# Altium PCB 6106 RC522门禁卡.PcbDoc
Units mil, origin at the board's own origin, x right, y up, seen from the top; angles counter-clockwise.
Board outline 3555 x 3945 mil, 2 copper layers (Top Layer, Bottom Layer); 30 components, 46 nets, 153 pads, 2 vias.
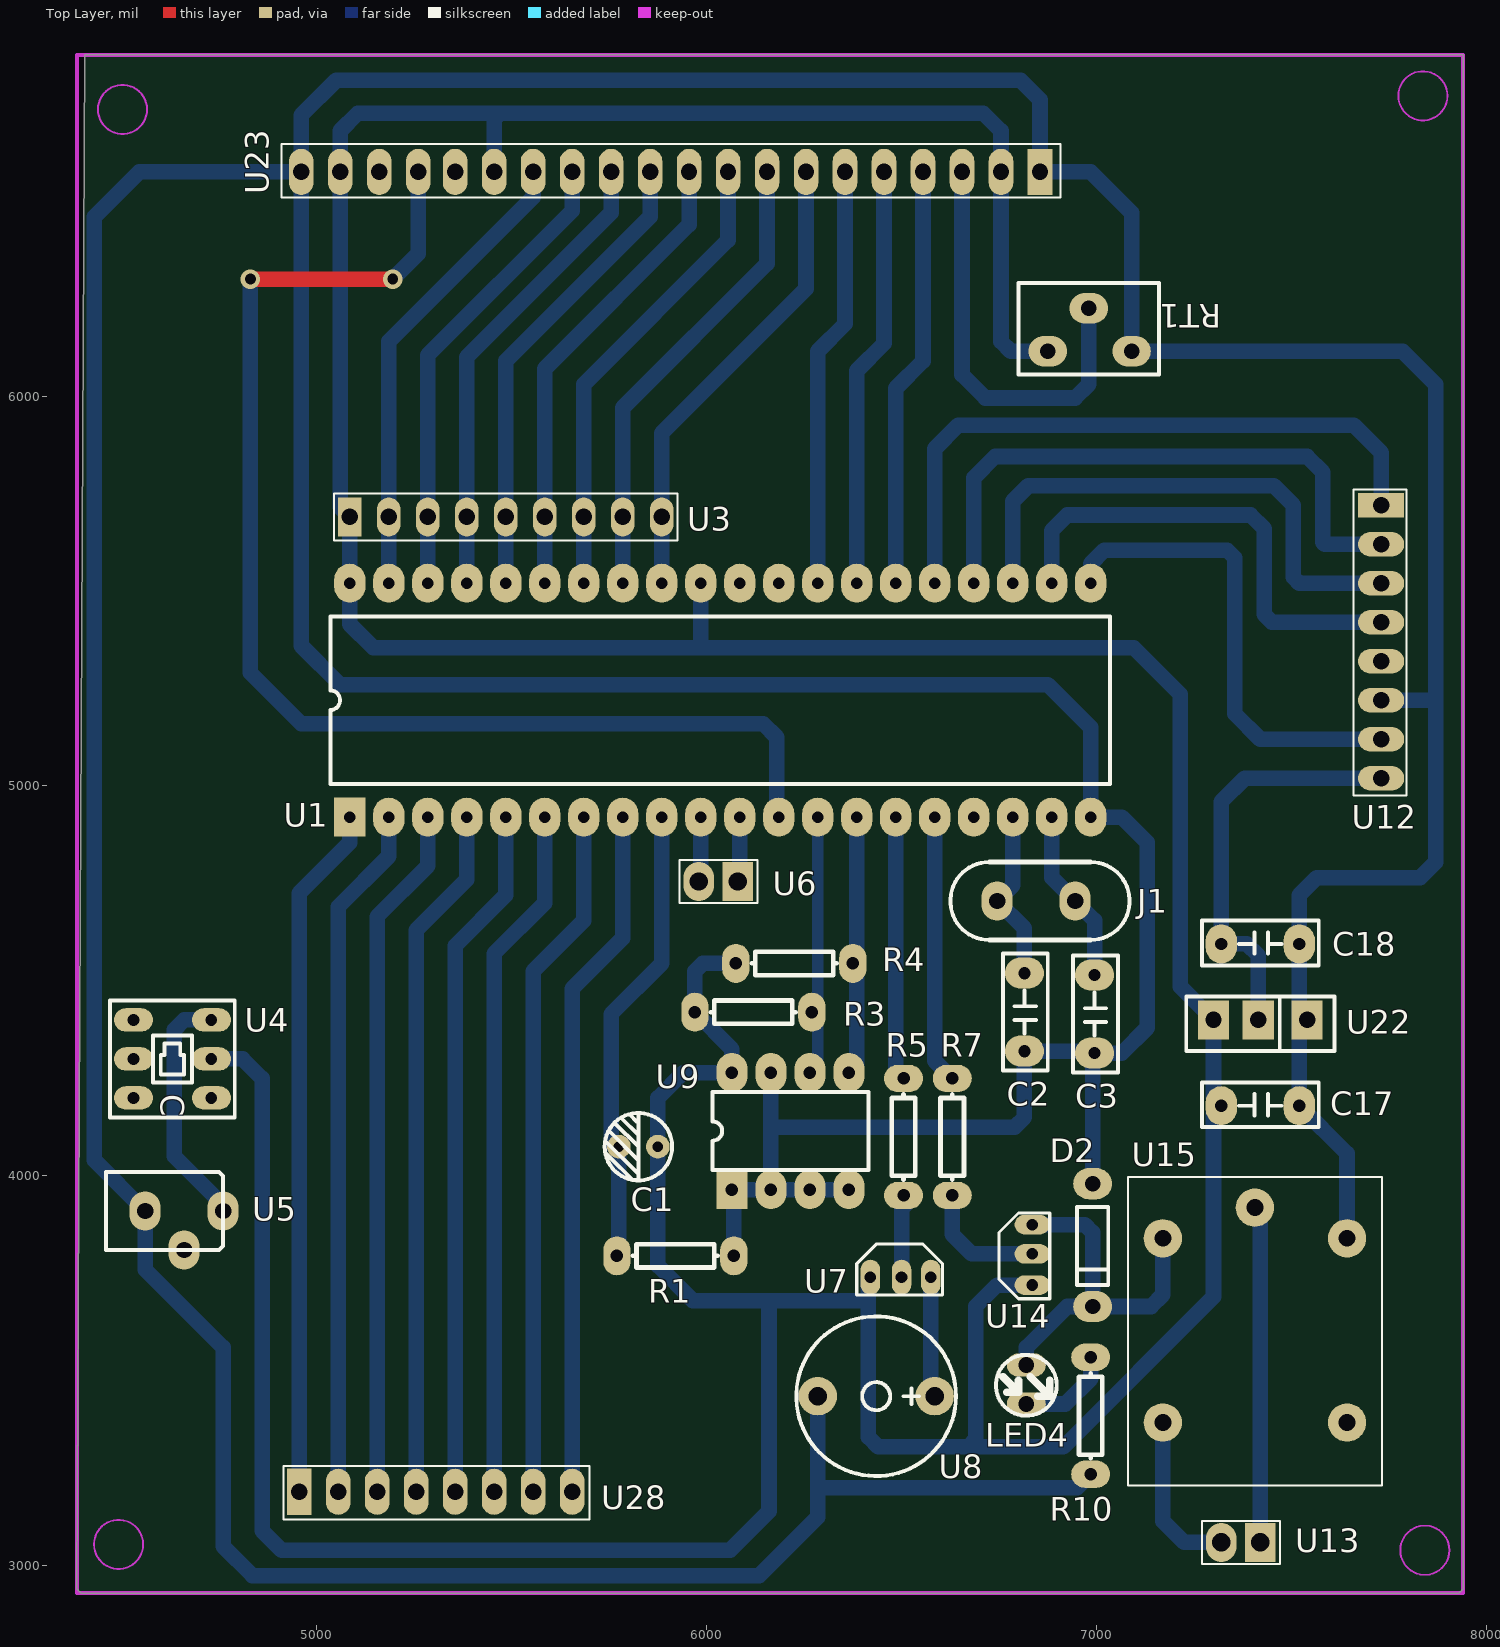
[diagram p0: Top Layer view]
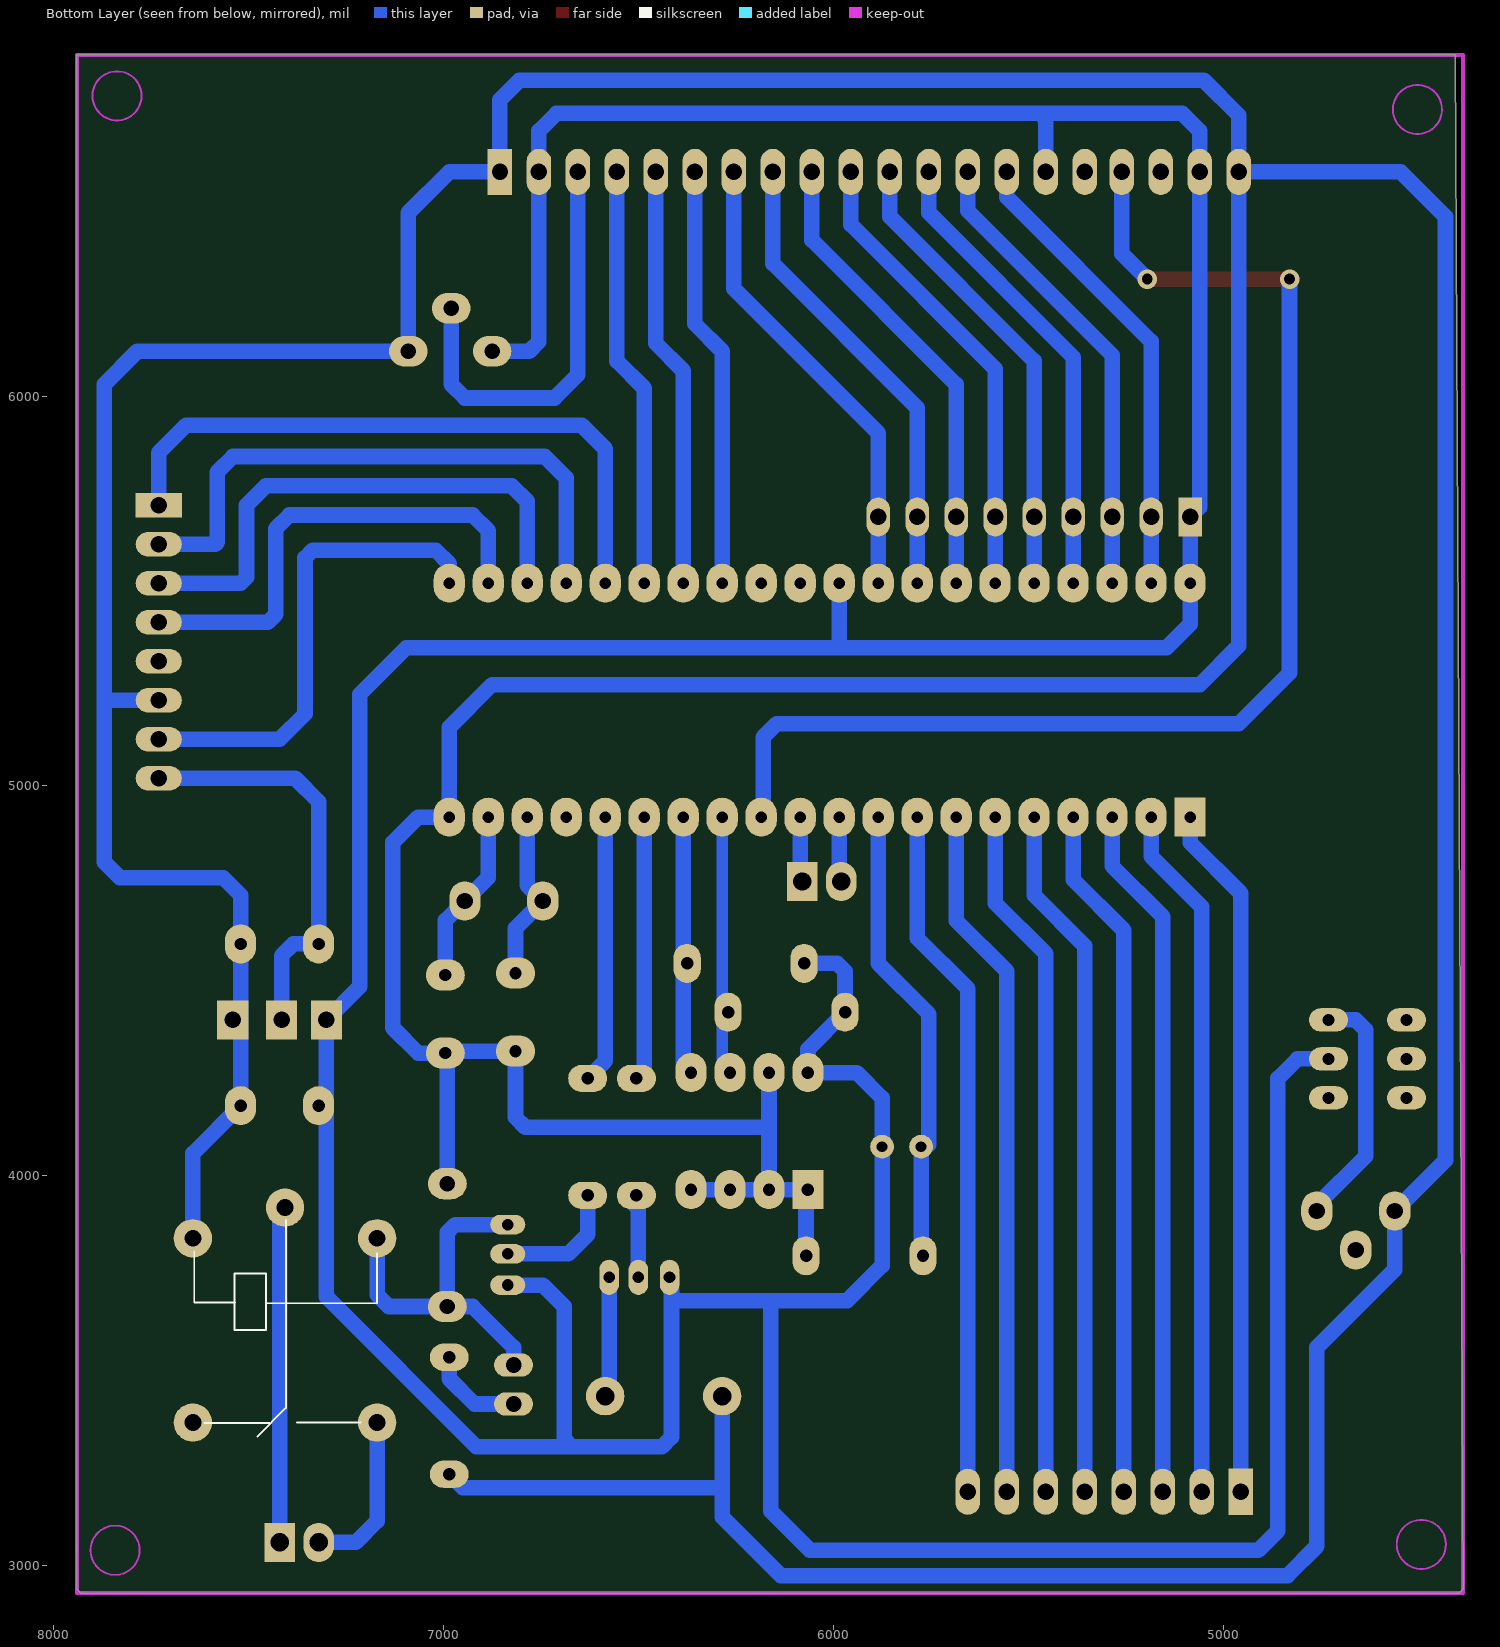
[diagram p1: Bottom Layer view, seen from below]

## Layer stack, top to bottom
Top Layer: signal copper 1.4
Dielectric: dielectric 12.6, FR-4, Dk 4.8
Bottom Layer: signal copper 1.4

## Board outline
4405,6875 7940,6875 7940,2940 7930,2930 4395,2930 4385,2940

## Design rules (kind name [scope] priority, off if disabled: settings)
Clearance [All] p1: gap=20
ComponentClearance [All] p1: gap=0 collisioncheckmode=3 verticalgap=0 showdistances=FALSE
PolygonConnect [All] p1: connectstyle=Relief reliefconductorwidth=10 reliefentries=4 polygonreliefangle="90 Angle" airgapwidth=10
RoutingVias [All] p1: holewidth=28 width=50 viastyle="Through Hole" minholewidth=28 minwidth=50 maxholewidth=28 maxwidth=50
SilkscreenOverComponentPads [All] p1: minsilkscreentomaskgap=10
SolderMaskExpansion [All] p1: expansion=4
Width [All] p1: maxlimit=40 minlimit=10 preferedwidth=40
26 further rules are at their usual default settings.

## Components (designator, comment, footprint, x,y, rotation, side; value= is the part's Value field where it differs from the comment)
C1 "10uF" C10 5825,4075 r0 top
C2 "22pF" CAP 6815,4320 r90 top
C3 "22pF" CAP 6995,4315 r90 top
C17 "0.1uF" CAP 7520,4180 r180 top
C18 "0.1uF" CAP 7520,4595 r180 top
D2 "IN4148" IN4148 6990,3980 r270 top
J1 "12MHZ" CRYSTAL 6945,4705 r270 top
LED4 "LED" LED 6820,3515 r270 top
R1 "10K" R-DIP 5770,3795 r0 top
R3 "10K" R-DIP 5970,4420 r0 top
R4 "10K" R-DIP 6075,4545 r0 top
R5 "1K" R-DIP 6505,4250 r270 top
R7 "1K" R-DIP 6630,4250 r270 top
R10 "1K" R-DIP 6985,3235 r90 top
RT1 "" RT1 7095,6115 r180 top
U1 "ST89C52" STC 5085,4920 r90 top
U3 "4.7K" SIP9 5085,5690 r0 top
U4 "SWITCH" SWITCH 4730,4400 r270 top
U5 "POW" DCM 4760,3910 r0 top
U6 "" SIP2 6080,4755 r180 top
U7 "PNP" PNP 6500,3735 r0 top
U8 "BELL" BEEP 6585,3435 r180 top
U9 "AT24C02" DIP8 6065,3965 r90 top
U12 "CON8" SIP8 7730,5720 r270 top
U13 "CON2" SIP2 7420,3060 r180 top
U14 "" PNP 6840,3800 r90 top
U15 "JDQ-5" JDQ-5 7170,3840 r0 top
U22 "LM1117" 7805 7510,4400 r180 top
U23 "LCD12864" SIP20 6855,6575 r180 top
U28 "CON8" SIP8 4955,3190 r0 top

## Footprints (in the part's own frame and the unit in brackets; to place one, negate y for a bottom-side part, rotate by r counter-clockwise, add the part's x,y. Pads: shape width x height; smd on the part's side, far side on the other; paste and mask are expansions set on the pad)
7805 [mil]
  rect 80x100 hole 42: 1(-30,0) 2(95,0) 3(210,0)
  silkscreen extent -100,-60 280,80
BEEP [mm]
  round 2.5 hole 1.2: 1(0,0) 2(7.62,0)
  silkscreen extent -1.38,-5.2 9.01,5.2
C10 [mm]
  round 1.54 hole 0.7: 1(1.27,0) 2(-1.27,0)
  silkscreen extent -2.2,-2.2 2.2,2.2
CAP [mil]
  oval 80x100 hole 31.5: 1(0,0) 2(200,0)
  silkscreen extent -50,-60 250,55
CRYSTAL [mil]
  oval 100x80 hole 42: 1(0,0) 2(0,-200)
  silkscreen extent -100,-320 100,140
DCM [mil]
  oval 80x100 hole 42: 1(0,0) 2(-200,0) 3(-100,-100)
  silkscreen extent -300,-100 0,100
DIP8 [mil]
  rect 100x80 hole 32: 1(0,0)
  oval 100x80 hole 32: 2(0,-100) 3(0,-200) 4(0,-300) 5(300,-300) 6(300,-200) 7(300,-100) 8(300,0)
  silkscreen extent 50,-350 250,50
IN4148 [mm]
  oval 2.032x2.54 hole 1: 1(0,0) 2(8,0)
  silkscreen extent 1.52,-1.02 6.6,1.02
JDQ-5 [mm]
  round 2.5 hole 1.1: 1(0,0) 2(12,0) 3(6,2) 4(12,-12) 5(0,-12)
  silkscreen extent -2.26,-16.12 14.28,4
LED [mil]
  oval 60x100 hole 40: 1(0,0) 2(100,0)
  silkscreen extent -26,-78 130,78
PNP [mil]
  oval 50x90 hole 30: 1(0,5) 2(-80,5) 3(75,5)
  silkscreen extent -115,-40 105,90
R-DIP [mil]
  oval 70x100 hole 32: 1(0,0) 2(300,0)
  silkscreen extent 41,-30 259,30
RT1 [mm]
  oval 2.5x2 hole 1: 1(0.127,0) 2(5.588,0) 3(2.921,-2.794)
  silkscreen extent -1.65,-4.44 7.49,1.52
SIP2 [mm]
  rect 2x2.54 hole 1.2: 1(0,0)
  oval 2x2.54 hole 1.2: 2(2.54,0)
  silkscreen extent -1.27,-1.4 3.81,1.4
SIP8 [mm]
  rect 1.6x3 hole 1.067: 1(0,0)
  oval 1.6x3 hole 1.067: 2(2.54,0) 3(5.08,0) 4(7.62,0) 5(10.16,0) 6(12.7,0) 7(15.24,0) 8(17.78,0)
  silkscreen extent -1.02,-1.8 18.91,1.66
SIP9 [mil]
  rect 60x100 hole 42: 1(0,0)
  oval 60x100 hole 42: 2(100,0) 3(200,0) 4(300,0) 5(400,0) 6(500,0) 7(600,0) 8(700,0) 9(800,0)
  silkscreen extent -40,-60 840,60
SIP20 [mm]
  rect 1.6x3 hole 1.067: 1(0,0)
  oval 1.6x3 hole 1.067: 2(2.54,0) 3(5.08,0) 4(7.62,0) 5(10.16,0) 6(12.7,0) 7(15.24,0) 8(17.78,0) 9(20.32,0) 10(22.86,0) 11(25.4,0) 12(27.94,0) 13(30.48,0) 14(33.02,0) 15(35.56,0) 16(38.1,0) 17(40.5,0) 18(43.04,0) 19(45.58,0) 20(48.12,0)
  silkscreen extent -1.35,-1.8 49.41,1.66
STC [mil]
  rect 100x80 hole 30: 1(0,0)
  oval 100x80 hole 30: 2(0,-100) 3(0,-200) 4(0,-300) 5(0,-400) 6(0,-500) 7(0,-600) 8(0,-700) 9(0,-800) 10(0,-900) 11(0,-1000) 12(0,-1100) 13(0,-1200) 14(0,-1300) 15(0,-1400) 16(0,-1500) 17(0,-1600) 18(0,-1700) 19(0,-1800) 20(0,-1900) 21(600,-1900) 22(600,-1800) 23(600,-1700) 24(600,-1600) 25(600,-1500) 26(600,-1400) 27(600,-1300) 28(600,-1200) 29(600,-1100) 30(600,-1000) 31(600,-900) 32(600,-800) 33(600,-700) 34(600,-600) 35(600,-500) 36(600,-400) 37(600,-300) 38(600,-200) 39(600,-100) 40(600,0)
  silkscreen extent 85,-1950 515,50
SWITCH [mil]
  oval 60x100 hole 30: 1(0,0) 2(0,-200) 3(100,0) 4(100,-200) 5(200,0) 6(200,-200)
  silkscreen extent -50,-260 250,60

## Part data
C17 C18: library part 0
U22: library part LM
U23: library part LCD1

## Via types
v1: diameter 50, hole 28, Top Layer to Bottom Layer, 2 vias

## Nets (pads, with @x,y where several pads share a name; then routed paths per layer and width w, separated by ;. In a path a pad name is that pad's centre, name@x,y a point inside that pad or via, vN(x,y) a via of type N, cw(c..) or ccw(c..) an arc to the next point about the centre after c; other vN are vias at no path point)
+3V3V: C18.2 U12.8 U22.2 | length 1072.3
  Bottom Layer w40: U22.2 7415,4565 7385,4595 C18.2 7320,4960 7380,5020 U12.8
ALARM: R5.1 U1.15 | length 678.3
  Bottom Layer w40: U1.15 6485,4270 R5.1
DB0: U1.32 U3.9 U23.7 | length 1208.3
  Bottom Layer w40: U1.32 U3.9 5885,5905 6255,6275 U23.7
DB1: U1.33 U3.8 U23.8 | length 1208.3
  Bottom Layer w40: U1.33 U3.8 5785,5970 6155,6340 U23.8
DB2: U1.34 U3.7 U23.9 | length 1208.3
  Bottom Layer w40: U1.34 U3.7 5685,6030 6055,6400 U23.9
DB3: U1.35 U3.6 U23.10 | length 1208.3
  Bottom Layer w40: U1.35 U3.6 5585,6070 5955,6440 U23.10
DB4: U1.36 U3.5 U23.11 | length 1208.3
  Bottom Layer w40: U1.36 U3.5 5485,6090 5855,6460 U23.11
DB5: U1.37 U3.4 U23.12 | length 1208.3
  Bottom Layer w40: U1.37 U3.4 5385,6100 5755,6470 U23.12
DB6: U1.38 U3.3 U23.13 | length 1208.3
  Bottom Layer w40: U1.38 U3.3 5285,6105 5655,6475 U23.13
DB7: U1.39 U3.2 U23.14 | length 1208.3
  Bottom Layer w40: U1.39 U3.2 5185,6140 5555,6510 U23.14
EN: U1.28 U23.6 | length 1084
  Bottom Layer w40: U1.28 6285,6115 6355,6185 U23.6
GND: C2.1 C3.1 C17.1 C18.1 D2.1 R1.2 R10.1 RT1.1 U1.20 U5.2 U8.2 U9.1 U9.2 U9.3 U9.4 U9.7 U12.6 U15.2 U22.1 U23.1 U23.20 | length 19667.1
  Bottom Layer w40: R1.2 6070,3960 U9.1 U9.2 ; U9.7 6165,4125 ; U8.2 6285,3200 ; U9.4 U9.3 U9.2 ; R10.1 6950,3200 6285,3200 ; D2.1 6990,4310 C3.1 ; U15.2 7642.44,4057.56 C17.1 C18.1 7520,4720 7565,4765 7830,4765 7870,4805 7870,5220 ; U12.6 7870,5220 ; U23.20 4960.51,5359.49 5060,5260 6875,5260 6985,5150 U1.20 7065,4920 7130,4855 7130,4380 7065,4315 C3.1 ; U23.20 4545,6575 4430,6460 4430,4040 U5.2 4560,3760 4760,3560 4760,3050 4835,2975 6135,2975 6285,3125 6285,3200 ; U23.20 4960.51,6720.51 5050,6810 6805,6810 6855,6760 U23.1 6985,6575 7090,6470 RT1.1 7785,6115 7870,6030 7870,5220 ; U9.2 6165,4125 ; 6165,4125 6790,4125 6815,4150 C2.1 6990,4320 C3.1
JDQ1: R7.1 U1.16 | length 688.6
  Bottom Layer w40: U1.16 6585,4295 R7.1
MISO: U1.22 U12.4 | length 1239.4
  Bottom Layer w40: U1.22 6885,5655 6925,5695 7395,5695 7430,5660 7430,5440 7450,5420 U12.4
MOSI: U1.23 U12.3 | length 1383.5
  Bottom Layer w40: U1.23 6785,5730 6825,5770 7455,5770 7505,5720 7505,5535 7520,5520 U12.3
NetC1_2: C1.2 R1.1 U1.9 | length 1175.9
  Bottom Layer w40: C1.2@5755,4080 5755,4415 5885,4545 U1.9 ; R1.1 5775,3800 C1.2
NetC2_2: C2.2 J1.2 U1.18 | length 445.6
  Bottom Layer w40: U1.18 6785,4745 J1.2 6815,4635 C2.2
NetC3_2: C3.2 J1.1 U1.19 | length 450.6
  Bottom Layer w40: U1.19 6885,4765 J1.1 6995,4655 C3.2
NetD2_2: D2.2 LED4.1 U14.3 U15.1 | length 949.2
  Bottom Layer w40: LED4.1 6820,3560 6925.04,3665.04 D2.2 ; U14.3 6970,3875 6990,3855 D2.2 ; U15.1 7170,3695 7140.04,3665.04 D2.2
NetLED4_2: LED4.2 R10.2 | length 246.9
  Bottom Layer w40: LED4.2 6920,3415 6985,3480 R10.2
NetR5_2: R5.2 U7.1 | length 224.5
  Bottom Layer w40: U7.1 6500,3915 R5.2@6535,3950
NetR7_2: R7.2 U14.1 | length 325.7
  Bottom Layer w40: R7.2 6630,3850 6680,3800 U14.1
NetRT1_3: RT1.3 U23.3 | length 1079.4
  Bottom Layer w40: U23.3 6655,6055 6715,5995 6945,5995 6980,6030 RT1.3
NetU1_1: U1.1 U28.1 | length 1783.8
  Bottom Layer w40: U28.1 4955,4725 5085,4855 U1.1
NetU1_2: U1.2 U28.2 | length 1783.8
  Bottom Layer w40: U28.2 5055,4690 5185,4820 U1.2
NetU1_3: U1.3 U28.3 | length 1783.8
  Bottom Layer w40: U28.3 5155,4665 5285,4795 U1.3
NetU1_4: U1.4 U28.4 | length 1783.8
  Bottom Layer w40: U28.4 5255,4630 5385,4760 U1.4
NetU1_5: U1.5 U28.5 | length 1783.8
  Bottom Layer w40: U28.5 5355,4590 5485,4720 U1.5
NetU1_6: U1.6 U28.6 | length 1783.8
  Bottom Layer w40: U28.6 5455,4570 5585,4700 U1.6
NetU1_7: U1.7 U28.7 | length 1783.8
  Bottom Layer w40: U28.7 5555,4525 5685,4655 U1.7
NetU1_8: U1.8 U28.8 | length 1783.8
  Bottom Layer w40: U28.8 5655,4480 5785,4610 U1.8
NetU4_1: U4.1 U5.1 | length 622.1
  Bottom Layer w40: U4.1 4660,4400 4635,4375 4635,4050 4760,3925 U5.1
NetU7_3: U7.3 U8.1 | length 309.1
  Bottom Layer w40: U7.3 6575,3445 U8.1
NetU13_1: U13.1 U15.3 | length 864.4
  Bottom Layer w40: U15.3 7420,3904.96 U13.1
NetU13_2: U13.2 U15.5 | length 425.3
  Bottom Layer w40: U15.5 7170,3115 7225,3060 U13.2
REST: U1.12 U23.17 | length 3302.6
  Top Layer w40: v1(4830,6300) v1(5195,6300)
  Bottom Layer w40: v1(4830,6300) 4830,5290 4960,5160 6145,5160 6180,5125 6180,4925 U1.12 ; v1(5195,6300) 5260.51,6365.51 U23.17
RS: U1.26 U23.4 | length 1084
  Bottom Layer w40: U1.26 6485,6020 6555,6090 U23.4
RST: U1.21 U12.7 | length 1244.7
  Bottom Layer w40: U1.21 6985,5570 7020,5605 7335,5605 7355,5585 7355,5185 7420,5120 U12.7
RW: U1.27 U23.5 | length 1084
  Bottom Layer w40: U1.27 6385,6065 6455,6135 U23.5
RXD: U1.10 U6.2 | length 160
  Bottom Layer w40: U6.2@5985,4760 U1.10
SCK: U1.24 U12.2 | length 1536.4
  Bottom Layer w40: U1.24 6685,5790 6740,5845 7540,5845 7580,5805 7580,5625 7585,5620 U12.2
SCL: R3.2 U1.13 U9.6 | length 663.3
  Bottom Layer w30: U9.6 6285,4285 U1.13
SDA: R4.2 U1.14 U9.5 | length 663.3
  Bottom Layer w40: U9.5 6385,4285 U1.14
SODA: U1.25 U12.1 | length 1678.8
  Bottom Layer w40: U1.25 6585,5865 6645,5925 7660,5925 7730,5855 U12.1
TXD: U1.11 U6.1 | length 160
  Bottom Layer w40: U6.1@6085,4760 U1.11
VCC: C1.1 C17.2 R3.1 R4.1 RT1.2 U1.31 U1.40 U3.1 U4.3 U7.2 U9.8 U14.2 U22.3 U23.2 U23.15 U23.19 | length 14659.8
  Bottom Layer w40: U4.3 4810,4300 4860,4250 4860,3090 4910,3040 6060,3040 6160,3140 6160,3680 ; U23.15 5455,6710 5470,6725 ; U1.31 5985,5355 ; R4.1 5990,4545 5970,4525 R3.1 6065,4325 U9.8 5940,4265 5875,4200 C1.1 5875,3770 5965,3680 6160,3680 ; U7.2@6415,3740 U7.2 6415,3735 6415,3675 ; U14.2 6745,3720 6690,3665 6690,3325 6670,3305 ; RT1.2 6780,6115 6755,6140 U23.2 6755,6680 6710,6725 5470,6725 ; 5470,6725 5105,6725 5060.51,6680.51 U23.19 5060.51,5714.49 U3.1 U1.40 5085,5415 5145,5355 5985,5355 ; 5985,5355 7095,5355 7215,5235 7215,4485 U22.3 7300,4200 C17.2 7300,4160 7300,3690 6915,3305 6670,3305 ; 6160,3680 6410,3680 6415,3675 ; 6415,3675 6415,3330 6440,3305 6670,3305
pads on no net: U1.17 U1.29 U1.30 U4.2 U4.4 U4.5 U4.6 U5.3 U12.5 U15.4 U23.16 U23.18

## Keep-outs
Keep-Out Layer:
  circle w5: c4492.01,3055 r62.99
  circle w5: c7842.01,3040 r62.99
  circle w5: c7837.01,6770 r62.99
  circle w5: c4502.01,6735 r62.99
  lines w10: 4385,2930 7940,2930 7940,6875 4385,6875 4385,2930

## Text inside footprints (layer, text, board x,y; h text height)
U4: Top Overlay "C" at 4600,4210 h60 r270